# Altium PCB telemetry_RF_pcb_r4.PcbDoc (part 1 of 3)
Units mil, origin at the board's own origin, x right, y up, seen from the top; angles counter-clockwise.
Board outline 3620 x 3014 mil, 2 copper layers (Top Layer, Bottom Layer); 34 components, 32 nets, 214 pads, 35 vias.
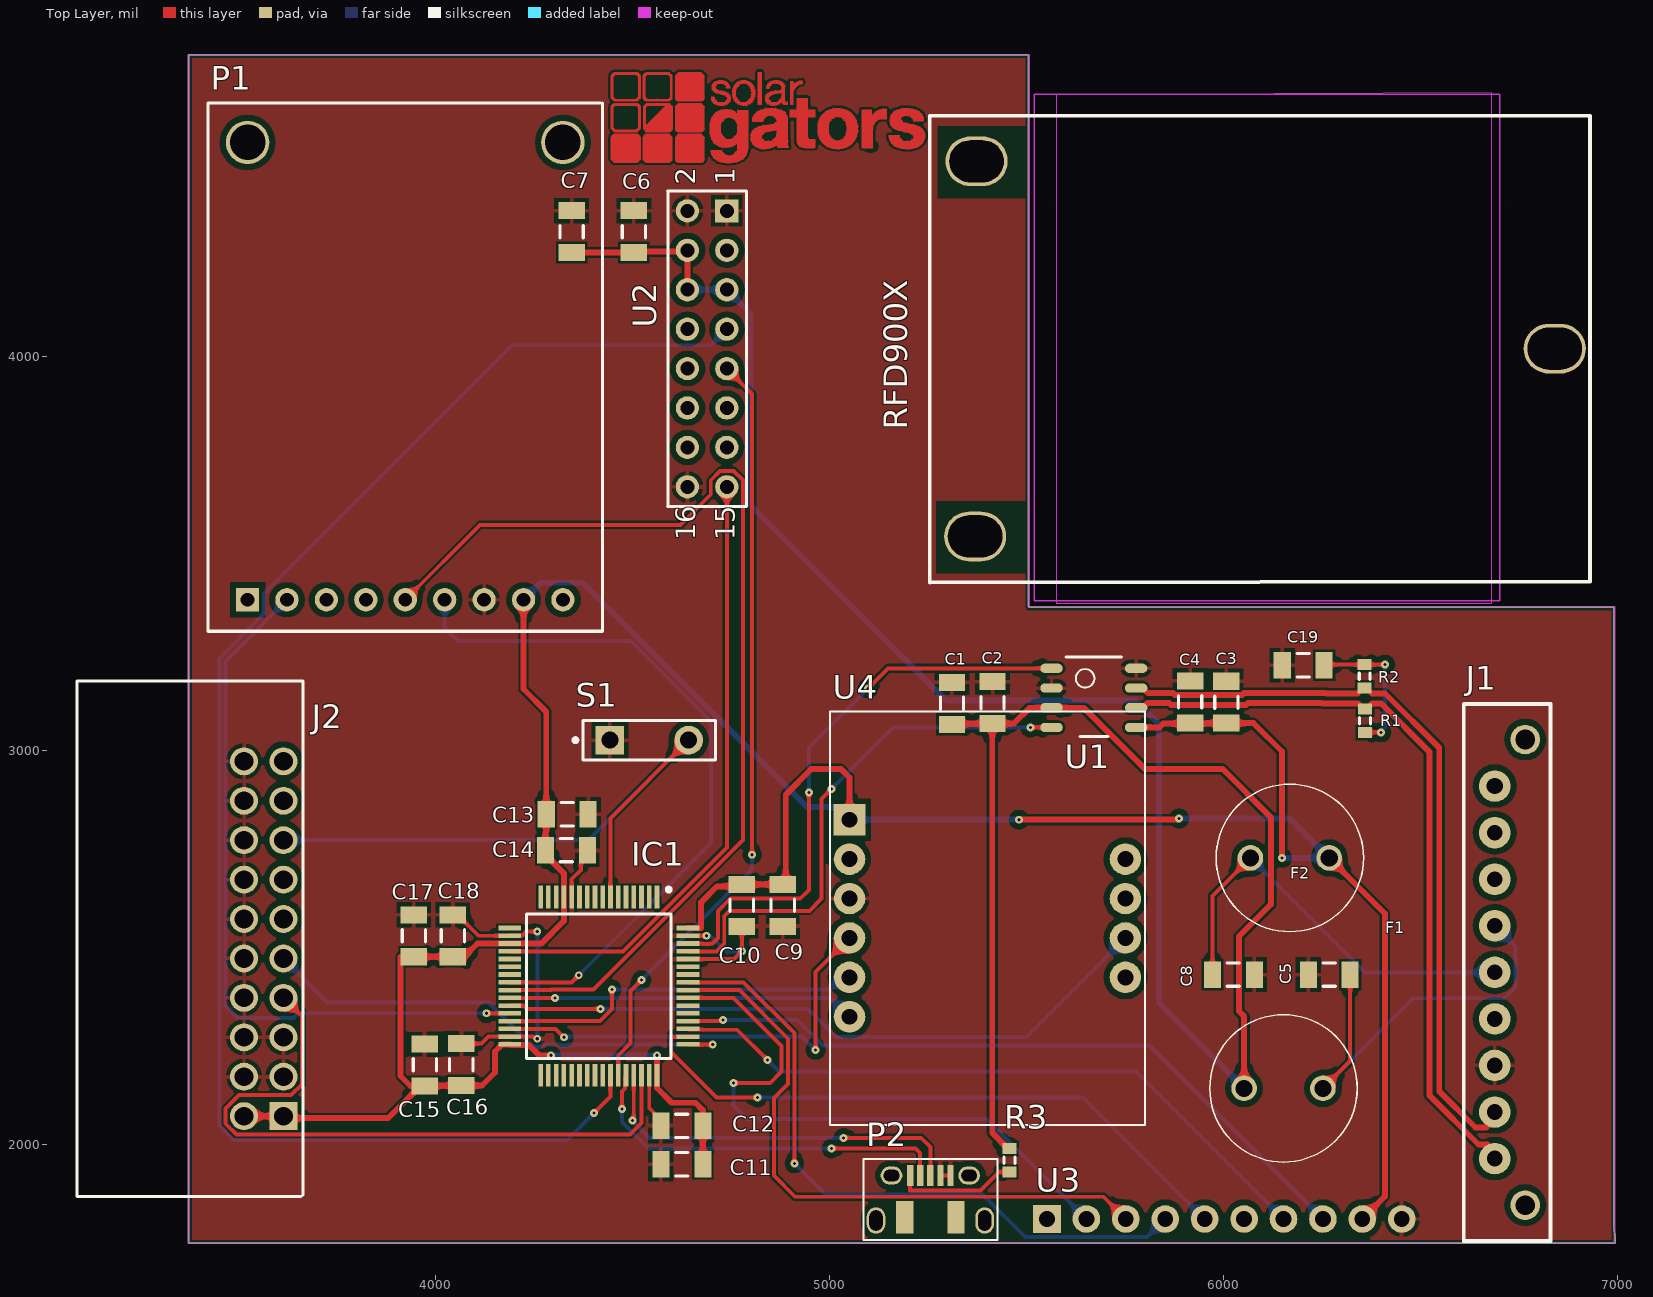
[diagram p0: Top Layer view]
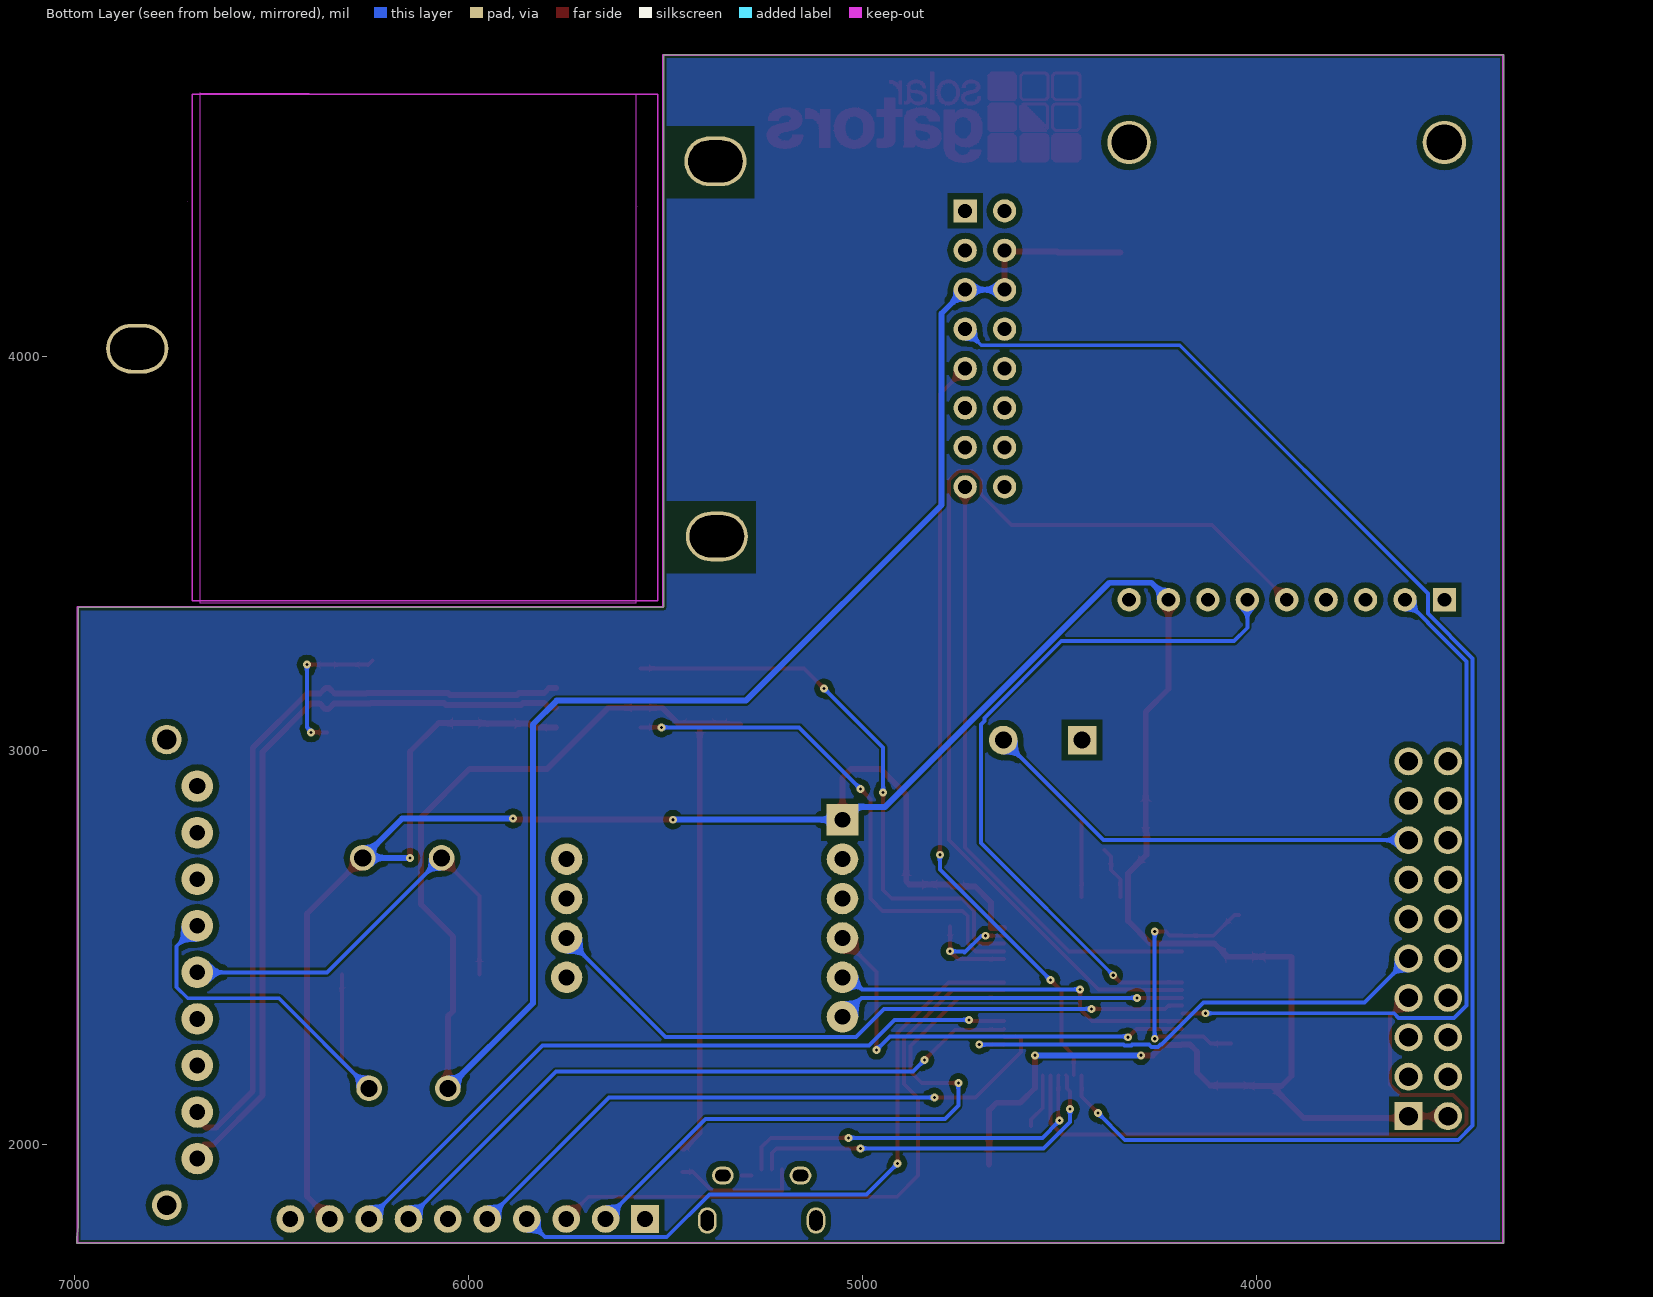
[diagram p1: Bottom Layer view, seen from below]

## Layer stack, top to bottom
Top Solder: solder mask 0.4, Solder Resist, Dk 3.5
Top Layer: signal copper 1.4
Dielectric 1: dielectric 12.6, FR-4, Dk 4.8
Bottom Layer: signal copper 1.4
Bottom Solder: solder mask 0.4, Solder Resist, Dk 3.5

## Board outline
5505,4765 5505,3365 5506,3364 6990,3364 6990,1792 6993,1764 6993,1751 3373,1751 3373,4764 3374,4765
cut-out: 6712,4392
cut-out: 5520,4665 5520,3380 6700,3380 6700,4665
cut-out: 5570,4380
cut-out: 5520,4665 6700,4665 6700,3380 5520,3380

## Design rules (kind name [scope] priority, off if disabled: settings)
Clearance [All] p1: gap=6 ignorepadtopadclearanceinfootprint=TRUE except(0: Arc-Hole Track-Hole SMDPad-Hole THPad-Hole Via-Hole Fill-Hole Poly-Hole Region-Hole Text-Hole; 9: THPad-THPad; 10: THPad-Via THPad-Text Via-Via Via-Text Fill-Text Poly-Text Region-Text Text-Text; 15: THPad-Fill THPad-Poly THPad-Region Via-Fill Via-Poly Via-Region Fill-Fill Fill-Poly Fill-Region Poly-Poly Poly-Region Region-Region)
ComponentClearance LCD [InComponent('U3')] p1: gap=0 collisioncheckmode=3 verticalgap=0 showdistances=FALSE
ComponentClearance GPS [InComponent('P1')] p2: gap=0 collisioncheckmode=3 verticalgap=0 showdistances=FALSE
DiffPairsRouting [All] p1: maxlimit=10 minlimit=10 mostfreqgap=10 toplayer_minwidth=15 toplayer_maxwidth=15 toplayer_prefwidth=15 bottomlayer_minwidth=15 bottomlayer_maxwidth=15 bottomlayer_prefwidth=15 maxuncoupledlength=500
HoleSize [All] p1: absolutevalues=TRUE maxlimit=247 minlimit=1 maxpercent=80.000 minpercent=20.000
MinimumSolderMaskSliver [All] p1 off: minsoldermaskwidth=10
PolygonConnect [InNet('GND') vs InNet('GND')] p1: connectstyle=Relief reliefconductorwidth=10 reliefentries=4 polygonreliefangle="90 Angle" airgapwidth=10
RoutingVias [All] p1: holewidth=16 width=50 viastyle="Through Hole" minholewidth=5 minwidth=20 maxholewidth=28 maxwidth=50
SilkToSilkClearance [All] p1 off: silktosilkclearance=10
SilkToSolderMaskClearance [IsPad] p1: minsilkscreentomaskgap=0.5 clearancetoexposedcopper=TRUE
SolderMaskExpansion [All] p1: expansion=4
Width [InNet('Vcc 3V3')] p1: maxlimit=15 minlimit=15 preferedwidth=15 minimp=50.000000 maximp=50.000000 favimp=50.000000
24 further rules are at their usual default settings.

## Classes and differential pairs
differential pair CAN: +CAN_P -CAN_N

## Components (designator, comment, footprint, x,y, rotation, side; value= is the part's Value field where it differs from the comment)
C1 "Cap Semi" C1206 5310.86,3120 r90 top value=100pF
C2 "Cap Semi" C1206 5413.86,3122 r90 top value=100pF
C3 "Cap Semi" C1206 6007,3123 r90 top value=100pF
C4 "Cap Semi" C1206 5915,3123.85 r90 top value=100pF
C5 "Cap Semi" C1206 6268,2432 r0 top value=100pF
C6 "Cap Semi" C1206 4504,4317 r90 top value=100pF
C7 "Cap Semi" C1206 4346,4317 r90 top value=100pF
C8 "Cap Semi" C1206 6025,2432 r180 top value=100pF
C9 "Cap Semi" C1206 4881.84,2607.76 r270 top value=100pF
C10 "Cap Semi" C1206 4777.84,2607.45 r270 top value=100pF
C11 "Cap Semi" C1206 4625.7,1950.76 r180 top value=100pF
C12 "Cap Semi" C1206 4625.7,2048.2 r180 top value=100pF
C13 "Cap Semi" C1206 4334.84,2838.76 r0 top value=100pF
C14 "Cap Semi" C1206 4332.84,2747.76 r0 top value=100pF
C15 "Cap Semi" C1206 3973.84,2202.76 r90 top value=100pF
C16 "Cap Semi" C1206 4065.84,2203.76 r90 top value=100pF
C17 "Cap Semi" C1206 3945.84,2530.56 r90 top value=100pF
C18 "Cap Semi" C1206 4044.84,2530.56 r90 top value=100pF
C19 "Cap Semi" C1206 6202,3217 r180 top value=100pF
F1 "56000001319" 56000001319 6377,2368.47 r180 top
F2 "56000001319" 56000001319 5943,2503 r0 top
IC1 "STM32F072RBT6TR" "STM32F072 64-pin" 4415.06,2402.6 r270 top
J1 "9-Pin Connector" 9-Pin 6829.73,1756.68 r90 top
J2 "61202021721" "ST-Link Header" 3615,2073 r90 top
P1 "GPS_Module" HDR1X10 3924,3303 r0 top
P2 "microUSB B" "microUSB B" 5256,1759 r0 top
R1 "Res3" J1-0603 6359,3076 r270 top value=60
R2 "Res3" J1-0603 6358,3189 r90 top value=60
R3 "Res3" J1-0603 5457,1961 r270 top value=1K
S1 "SW-PB" SPST-2 4543.02,3026.91 r0 top
U1 "TCAN1042HV" CANIC 5880.72,3104 r0 top
U2 "RFD900x" RFD900X_w_conn 5255.55,4609.45 r90 top
U3 "LCD" LCD 5202,1711.21 r0 top
U4 "IMU" IMU 5001,3100 r270 top

## Footprints (in the part's own frame and the unit in brackets; to place one, negate y for a bottom-side part, rotate by r counter-clockwise, add the part's x,y. Pads: shape width x height; smd on the part's side, far side on the other; paste and mask are expansions set on the pad)
9-Pin [mil]
  round 80 hole 41: 1(1153.54,141.73)
  round 80 hole 40: 2(1035.43,141.73) 3(917.32,141.73) 4(799.21,141.73) 5(681.1,141.73) 6(562.99,141.73) 7(444.88,141.73) 8(326.77,141.73) 9(208.66,141.73)
  round 75 hole 50: 10(90.55,64.57) 11(1271.65,64.57)
  silkscreen extent 0,0 1362,220
56000001319 [mm]
  round 1.65 hole 1.1: 1(3.175,5.715) 2(8.255,5.715)
  silkscreen extent 0.96,0.96 10.47,10.47
C1206 [mm] "Chip Capacitor, Body 3.2x1.6mm, IPC High Density"
  rect 1.1x1.7 smd: 1(-1.35,0) 2(1.35,0)
  silkscreen extent -0.4,-0.75 0.4,0.75, body extent -1.7,-0.9 1.7,0.9, height 1.3
CANIC [mm]
  oval 1.45x0.6 smd paste+0 mask+0.051: 1(-8.059,2.667) 2(-8.059,1.397) 3(-8.059,0.127) 4(-8.059,-1.143) 5(-2.609,-1.143) 6(-2.609,0.127) 7(-2.609,1.397) 8(-2.609,2.667)
  silkscreen extent -7.11,-1.74 -3.56,3.4, body extent -7.29,-1.68 -3.38,3.53, height 1.75
HDR1X10 [mm]
  rect 1.5x1.5 hole 0.9: 1(-10.16,2.032)
  round 1.5 hole 0.9: 2(-7.62,2.032) 3(-5.08,2.032) 4(-2.54,2.032) 5(0,2.032) 6(2.54,2.032) 7(5.08,2.032) 8(7.62,2.032) 9(10.16,2.032)
  round 2.794 hole 2.286 unplated: P$1(-10.16,31.496) P$2(10.16,31.496)
  silkscreen extent -12.7,0 12.7,34.04
IMU [mil]
  rect 80x80 hole 40: 1(275,50)
  round 80 hole 40: 2(375,50) 3(475,50) 4(575,50) 5(675,50) 6(775,50) 7(375,750) 8(475,750) 9(575,750) 10(675,750)
  silkscreen extent 0,0 1050,800
J1-0603 [mm] "Chip Resistor, Body 1.6x0.8mm, IPC High Density"
  rect 0.7x0.9 smd: 1(-0.75,0) 2(0.75,0)
  silkscreen extent -0.2,-0.35 0.2,0.35, body extent -0.85,-0.48 0.85,0.48, height 0.9
LCD [mil]
  rect 70x70 hole 40: 1(350,100.79)
  round 70 hole 40: 2(450,100.79) 3(550,100.79) 4(650,100.79) 5(750,100.79) 6(850,100.79) 7(950,100.79) 8(1050,100.79) 9(1150,100.79) 10(1250,100.79)
"microUSB B" [mm]
  rect 0.4x1.35 smd: 1(-1.3,4.15) 2(-0.65,4.15) 3(0,4.15) 4(0.65,4.15) 5(1.3,4.15)
  oval 1.4x1.15 hole 0.75 slot 1 at 0 deg unplated: P$1(-2.5,4.15) P$2(2.5,4.15)
  oval 1.2x1.7 hole 1.3 slot 0.85 at 0 deg unplated: P$3(-3.5,1.25) P$4(3.5,1.25)
  rect 1.1x2.1 smd: P$5(-1.65,1.45) P$6(1.65,1.45)
  silkscreen extent -4.32,0 4.32,5.21
RFD900X_w_conn [mm]
  rect 1.5x1.5 hole 0.9: 1(-6.097,13.1)
  round 1.5 hole 0.9: 2(-6.097,15.64) 3(-8.637,13.1) 4(-8.637,15.64) 5(-11.177,13.1) 6(-11.177,15.64) 7(-13.717,13.1) 8(-13.717,15.64) 9(-16.257,13.1) 10(-16.257,15.64) 11(-18.797,13.1) 12(-18.797,15.64) 13(-21.337,13.1) 14(-21.337,15.64) 15(-23.877,13.1) 16(-23.877,15.64)
  oval 3.2x4 hole 3.5 slot 2.7 at 0 deg: ""(-27.072,-2.9) ""(-14.972,-40.245) ""(-2.9,-2.99)
  Keep-Out Layer board cut-out: 1.397,-8.128 -31.368,-8.128 -31.369,-8.129 -31.369,-36.196 1.524,-36.196
  silkscreen extent -34.16,-42.52 1.4,16.91, body extent -29.99,-53.34 0.15,-8, height 7.5
SPST-2 [mm] "Switch; 2 Leads"
  rect 1.85x1.85 hole 1.1: 1(-2.54,0)
  round 1.85 hole 1.1: 2(2.54,0)
  silkscreen extent -4.89,-1.27 4.28,1.27
"ST-Link Header" [mm]
  rect 1.8x1.8 hole 1.2: 1(0,0)
  round 1.8 hole 1.2: 2(0,2.54) 3(2.54,0) 4(2.54,2.54) 5(5.08,0) 6(5.08,2.54) 7(7.62,0) 8(7.62,2.54) 9(10.16,0) 10(10.16,2.54) 11(12.7,0) 12(12.7,2.54) 13(15.24,0) 14(15.24,2.54) 15(17.78,0) 16(17.78,2.54) 17(20.32,0) 18(20.32,2.54) 19(22.86,0) 20(22.86,2.54)
  silkscreen extent -5.17,-1.25 28.03,13.3
"STM32F072 64-pin" [mm]
  rect 1.475x0.3 smd: 1(-5.738,3.75) 2(-5.738,3.25) 3(-5.738,2.75) 4(-5.738,2.25) 5(-5.738,1.75) 6(-5.738,1.25) 7(-5.738,0.75) 8(-5.738,0.25) 9(-5.738,-0.25) 10(-5.738,-0.75) 11(-5.738,-1.25) 12(-5.738,-1.75) 13(-5.738,-2.25) 14(-5.738,-2.75) 15(-5.738,-3.25) 16(-5.738,-3.75) 33(5.738,-3.75) 34(5.738,-3.25) 35(5.738,-2.75) 36(5.738,-2.25) 37(5.738,-1.75) 38(5.738,-1.25) 39(5.738,-0.75) 40(5.738,-0.25) 41(5.738,0.25) 42(5.738,0.75) 43(5.738,1.25) 44(5.738,1.75) 45(5.738,2.25) 46(5.738,2.75) 47(5.738,3.25) 48(5.738,3.75)
  rect 0.3x1.475 smd: 17(-3.75,-5.738) 18(-3.25,-5.738) 19(-2.75,-5.738) 20(-2.25,-5.738) 21(-1.75,-5.738) 22(-1.25,-5.738) 23(-0.75,-5.738) 24(-0.25,-5.738) 25(0.25,-5.738) 26(0.75,-5.738) 27(1.25,-5.738) 28(1.75,-5.738) 29(2.25,-5.738) 30(2.75,-5.738) 31(3.25,-5.738) 32(3.75,-5.738) 49(3.75,5.738) 50(3.25,5.738) 51(2.75,5.738) 52(2.25,5.738) 53(1.75,5.738) 54(1.25,5.738) 55(0.75,5.738) 56(0.25,5.738) 57(-0.25,5.738) 58(-0.75,5.738) 59(-1.25,5.738) 60(-1.75,5.738) 61(-2.25,5.738) 62(-2.75,5.738) 63(-3.25,5.738) 64(-3.75,5.738)
  silkscreen extent -6.35,-4.65 4.65,4.65, body extent -6,-6 6,6, height 1.6

## Part data
C1 C2 C3 C4 C5 C6 C7 C8 C9 C10 C11 C12 C13 C14 C15 C16 C17 C18 C19: "Capacitor (Semiconductor SIM Model)", LatestRevisionDate=29-May-2009, LatestRevisionNote="IPC-7351 Footprint Added.", PackageDescription="Chip Capacitor", PackageReference=C1206, Published=8-Jun-2000, Publisher="Altium Limited"
F1 F2: "Fuse", Manufacturer_Name=LITTELFUSE, Mouser Part Number=576-56000001319, Datasheet Link=https://componentsearchengine.com/Datasheets/1/56000001319.pdf, Height=4.3mm, Manufacturer_Part_Number=56000001319, Mouser Price/Stock=https://www.mouser.com/Search/Refine.aspx?Keyword=576-56000001319
IC1: "Integrated Circuit", Manufacturer_Name=STMicroelectronics, Mouser Part Number=511-STM32F072RBT6TR, Datasheet Link=https://componentsearchengine.com/Datasheets/1/STM32F072RBT6TR.pdf, Height=1.6mm, Manufacturer_Part_Number=STM32F072RBT6TR, Mouser Price/Stock=https://www.mouser.com/Search/Refine.aspx?Keyword=511-STM32F072RBT6TR
J2: "Wurth Elektronic 20 pin connector Programmar", Manufacturer_Name="Wurth Elektronik", Mouser Part Number=710-61202021721, Datasheet Link=https://componentsearchengine.com/Datasheets/1/61202021721.pdf, Height=9.25mm, Manufacturer_Part_Number=61202021721, Mouser Price/Stock=https://www.mouser.com/Search/Refine.aspx?Keyword=710-61202021721
P1: library part "Header 10", "Header, 10-Pin", LatestRevisionDate=17-Jul-2002, LatestRevisionNote="Re-released for DXP Platform.", Publisher="Altium Limited"
R1 R2 R3: "Resistor", LatestRevisionDate=29-May-2009, LatestRevisionNote="IPC-7351 Footprint Added.", PackageDescription="Chip Resistor", PackageReference=J1-0603, Published=8-Jun-2000, Publisher="Altium Limited"
S1: "Switch", LatestRevisionDate=17-Jul-2002, LatestRevisionNote="Re-released for DXP Platform.", PackageDescription="Switch; 2 Leads", PackageReference=SPST-2, Published=24-Mar-1999, Publisher="Altium Limited"
U1: "TCAN1042Fault ProtectedCAN Transceiverwith CAN FD", ComponentLink1Description=Datasheet, ComponentLink1URL=http://www.ti.com/lit/ds/symlink/tcan1042hgv.pdf
U2: "RF Modem", ComponentLink1Description="Datasheet Library", ComponentLink1URL=https://files.rfdesign.com.au/docs/, ComponentLink2Description=Connector, ComponentLink2URL=https://s3.amazonaws.com/catalogspreads-pdf/PAGE123%20.100%20SFH11%20SERIES%20FEMALE%20HDR%20ST%20RA.pdf

## Via types
v1: diameter 20, hole 7.87, Top Layer to Bottom Layer, 21 vias
v2: diameter 20, hole 8, Top Layer to Bottom Layer, 14 vias

## Nets (pads, with @x,y where several pads share a name; then routed paths per layer and width w, separated by ;. In a path a pad name is that pad's centre, name@x,y a point inside that pad or via, vN(x,y) a via of type N, cw(c..) or ccw(c..) an arc to the next point about the centre after c; other vN are vias at no path point)
5VT_F: C1.1 C2.1 C6.1 C7.1 F1.2 R3.1 U1.3 U2.4 U2.5 U2.6 | length 6115.9
  Top Layer w10: C7.1@4346,4263.85 C7.1@4348,4261.85 ; C2.1@5413,3068.85 C2.1@5413.86,3068.85
  Top Layer w15: C7.1@4346,4263.85 C6.1@4504,4263.85 4506.79,4266.64 4637.02,4266.64 U2.4@4639.8,4269.42 U2.6@4639.8,4169.42 ; C1.1@5310.86,3066.85 5363,3068.85 5413,3068.85 5413,2030.59 5453.06,1990.53 R3.1@5457,1990.53 ; C2.1@5413.86,3068.85 5468,3068.85 5508.15,3109 U1.3@5563.43,3109 5645,3109 5800,2954 5997,2954 6120,2831 6120,2610 6039,2529 6039,2339 6052,2326 F1.2@6052,2143.47
  Bottom Layer w15: U2.6@4639.8,4169.42 U2.5@4739.8,4169.42 4800,4109.23 4800,3623 5296,3127 5776,3127 5836,3067 5836,2359.47 F1.2@6052,2143.47
CAN_N: J1.9 R1.1 U1.6 | length 1931.3
  Top Layer w15: U1.6@5778,3109 5795.33,3109 5807.83,3121.5 5860.79,3121.5 5866.4,3115.9 6056.45,3115.9 6062.06,3121.5 6248.01,3121.5 6249.51,3120 6340.59,3120 6355.06,3105.53 6362.94,3105.53 6377.41,3120 6399.22,3120 6522,2997.22 6522,2125.7 6646.7,2001 6669.49,2001 6688,1982.49 J1.9@6688,1965.34
CAN_P: J1.8 R2.1 U1.7 | length 1925.2
  Top Layer w15: U1.7@5778,3159 5795.33,3159 5807.83,3146.5 5871.15,3146.5 5876.75,3140.9 6046.1,3140.9 6051.7,3146.5 6258.37,3146.5 6259.87,3145 6339.59,3145 6354.06,3159.47 6361.94,3159.47 6376.41,3145 6409.57,3145 6547,3007.57 6547,2136.06 6638.84,2044.22 6665.92,2044.22 6688,2066.3 J1.8@6688,2083.45
CS: IC1.50 U3.5 | length 1607.9
  Top Layer w10: IC1.50@4640.97,2274.65 4640.06,2273.74 4602.58,2273.74 4598.1,2269.27 4598.1,2236.03 4713.87,2120.27 v1(4818,2120.27)
  Bottom Layer w10: v1(4818,2120.27) 5643.73,2120.27 U3.5@5952,1812
F: IC1.52 U3.8 | length 1821.4
  Top Layer w10: IC1.52@4640.97,2314.02 4724.32,2314.02 4727.29,2317 v2(4730,2317)
  Bottom Layer w10: v2(4730,2317) 4919,2317 4984,2252 5812,2252 U3.8@6252,1812
GND: C1.2 C2.2 C3.2 C4.2 C5.1 C6.2 C7.2 C8.1 C9.2 C10.2 C11.2 C12.2 C13.2 C14.2 C15.2 C16.2 C17.2 C18.2 C19.2 IC1.12 IC1.18 IC1.31 IC1.47 IC1.60 IC1.63 J1.7 J2.3 J2.4 J2.5 J2.6 J2.8 J2.10 J2.12 J2.14 J2.16 J2.18 J2.20 P1.7 P2.4 P2.5 S1.1 U1.2 U1.8 U2.1 U2.2 U2.16 U3.10 U4.3 | length 1370.4
  Top Layer w10: C18.2@4044.84,2583.71 4056.65,2583.71 4109.8,2530.56 IC1.18@4189.16,2530.56 4190.06,2531.46 4221.02,2531.46 4230.55,2541 v2(4259,2541) ; C16.2@4065.84,2256.91 4117.53,2256.91 4135.26,2274.65 4248.35,2274.65 v2@4250,2273 ; IC1.12@4346.17,2628.51 4346.17,2673.88 4369.34,2697.05 4369.34,2731.11 C14.2@4385.99,2747.76 ; IC1.47@4543.02,2176.7 4543.02,2093.94 4572.55,2064.4 C12.2@4572.55,2048.2 ; IC1.60@4640.97,2471.5 4758.16,2471.5 v2(4777.84,2491.19) C10.2@4777.84,2554.3 ; IC1.63@4640.97,2530.56 v2(4687.93,2530.56) ; P2.4@5281.59,1922.39 P2.5@5307.18,1922.39
  Bottom Layer w10: v2(4259,2269.27) v2(4259,2541) ; v2(4687.93,2530.56) 4698.44,2530.56 4741,2488 4744.19,2491.19 v2(4777.84,2491.19)
GPIO1: IC1.20 U2.15 | length 1574.4
  Top Layer w10: IC1.20@4189.16,2491.19 4476.02,2491.19 4739.8,2754.97 U2.15@4739.8,3669.42
GPS_EN: IC1.28 P1.2 | length 1843.4
  Top Layer w10: v1(4130,2334) 4130.15,2333.85 4188.72,2333.85 IC1.28@4188.86,2334
  Bottom Layer w10: P1.2@3624,3372.03 P1.2@3624,3383 3566,3325 3566,3323.84 3468.47,3226.31 3468.47,2353.53 3500,2322 3640,2322 3652,2334 v1(4130,2334)
GPS_RX: IC1.24 P1.6 | length 1810.7
  Top Layer w10: IC1.24@4189.16,2412.45 4346.17,2412.45 v1(4364.19,2430.47)
  Bottom Layer w10: P1.6@4024,3383 4024,3312 4058,3278 4496,3278 4691,3083 4691,3075 4700,3066 4700,2766.28 v1(4364.19,2430.47)
GPS_TX: IC1.25 P1.5 | length 2684.9
  Top Layer w10: P1.5@3924,3383 4114,3573 4622,3573 4699,3650 4699,3686.08 4722.98,3710.05 4756.63,3710.05 4780.43,3686.25 4780.43,2772.97 4401.53,2394.08 4295.42,2394.08 4294.11,2392.76 IC1.25@4189.16,2392.76
J: IC1.26 U4.6 | length 885.3
  Top Layer w10: IC1.26@4190.06,2372.17 IC1.26@4189.16,2373.08 4302.31,2373.08 4303.22,2372.17 v1(4304.12,2373.08)
  Bottom Layer w10: v1@4303.05,2372 v1(4304.12,2373.08) 5002.92,2373.08 U4.6@5051,2325
K: IC1.27 U4.9 | length 1698.8
  Top Layer w10: IC1.27@4189.16,2353.39 4224.6,2353.39 4232.99,2345 v1(4419.11,2345)
  Bottom Layer w10: v1(4419.11,2345) 4945.9,2345 5017,2273.9 5499.9,2273.9 U4.9@5751,2525
LCD_RST: IC1.51 U3.7 | length 1710.8
  Top Layer w10: IC1.51@4640.97,2294.34 4643.13,2292.18 4765.82,2292.18 v1(4843,2215)
  Bottom Layer w10: v1(4843,2215) 4872.1,2185.9 5778.1,2185.9 U3.7@6152,1812
MISO: IC1.56 U3.3 | length 1606
  Top Layer w10: IC1.56@4640.97,2392.76 4771.57,2392.76 4895,2269.33 4895,2155 4859,2119 4859,1922 4912.48,1868.52 5695.48,1868.52 U3.3@5752,1812
MOSI: IC1.57 U3.4 | length 1691.8
  Top Layer w10: IC1.57@4640.97,2412.45 4782.57,2412.45 4911,2284.02 v1(4911,1953)
  Bottom Layer w10: v1(4911,1953) 4990,1874 5388.75,1874 5496.85,1765.9 5805.9,1765.9 U3.4@5852,1812
NetC5_2: C5.2 F1.1 J1.4 | length 1088.9
  Top Layer w10: F1.1@6252,2143.47 6321.15,2212.62 C5.2@6321.15,2432
  Bottom Layer w10: F1.1@6252,2143.47 6480.53,2372 6712,2372 6740,2400 6740,2503.89 J1.4@6688,2555.89
NetC8_2: C8.2 F2.1 J1.5 | length 1076
  Top Layer w10: C8.2@5971.85,2432 5971.85,2631.85 F2.1@6068,2728
  Bottom Layer w10: F2.1@6068,2728 6358.22,2437.78 J1.5@6688,2437.78
NetC19_1: C19.1 R1.2 R2.2 | length 387.9
  Top Layer w10: C19.1@6243.62,3228.53 6255.15,3217 6256.68,3218.53 v2(6409.57,3218.53) ; R1.2@6359,3046.47 6398.47,3046.47 v2@6399,3047
  Bottom Layer w10: v2(6399.22,3046.47) 6399.22,3049.18 6409.57,3059.53 v2(6409.57,3218.53)
NetP2_1: P2.1 R3.2 | length 325.1
  Top Layer w10: P2.1@5204.82,1938 5204.82,1884.52 5383.52,1884.52 5430.47,1931.47 R3.2@5457,1931.47
NRST: IC1.7 J2.15 S1.2 | length 1613.8
  Top Layer w10: IC1.7@4444.59,2628.51 4444.59,2828.49 S1.2@4643.02,3026.91
  Bottom Layer w10: J2.15@3615,2773 4389.1,2773 S1.2@4643.02,3026.91
RX: IC1.42 U2.7 | length 3954.8
  Top Layer w10: v1(4402.4,2080.5) 4444.59,2122.69 IC1.42@4444.59,2176.7
  Bottom Layer w10: v1(4402.4,2080.5) 4334.9,2013 3489,2013 3452.47,2049.53 3452.47,3234.09 3566,3347.63 3566,3399.16 4195.46,4028.62 4699,4028.62 U2.7@4739.8,4069.42
RXD: IC1.61 U1.4 | length 1346.5
  Top Layer w10: IC1.61@4640.97,2491.19 4713.07,2491.19 4733.28,2511.39 4733.28,2580.55 4746.47,2593.75 4949,2593.75 4980,2624.75 4980,2878 v2(5005,2903) ; v1(5510,3059) U1.4@5563.43,3059
  Bottom Layer w10: v2(5005,2903) 5161,3059 v1(5510,3059)
SCK: IC1.55 U3.2 | length 1558.9
  Top Layer w10: IC1.55@4640.97,2373.08 4756.92,2373.08 4879,2251 4879,2186 4850,2157 v1(4757,2157)
  Bottom Layer w10: v1(4757,2157) 4757,2100 4791,2066 5398,2066 U3.2@5652,1812
SCL: IC1.29 U4.5 | length 937
  Top Layer w10: IC1.29@4189.16,2314.02 4417.83,2314.02 4448.36,2344.55 v1(4448.36,2394.41)
  Bottom Layer w10: v1(4448.36,2394.41) 5001.47,2394.41 5032.06,2425 U4.5@5051,2425
SDA: IC1.30 U4.4 | length 1119.4
  Top Layer w10: IC1.30@4189.16,2294.34 4305.66,2294.34 v1(4327,2273) ; v1(4965,2241) 4965,2439 U4.4@5051,2525
  Bottom Layer w10: v1(4327,2273) 4329.26,2275.26 4930.74,2275.26 v1(4965,2241)
SWCLK: IC1.49 J2.9 | length 1251.1
  Top Layer w10: IC1.49@4640.97,2254.97 4643.02,2252.92 4644.35,2254.26 v1(4704.11,2254.26)
  Bottom Layer w10: J2.9@3615,2473 3727,2361 4135.21,2361 4241.96,2254.26 4244.31,2254.26 4250.3,2248.27 4267.7,2248.27 4273.69,2254.26 4316.04,2254.26 4318.3,2252 4335.7,2252 4337.96,2254.26 v1(4704.11,2254.26)
SWDIO: IC1.46 J2.7 | length 1694.9
  Top Layer w10: J2.7@3615,2373 3661.53,2326.47 3661.53,2153.73 3634.27,2126.47 3502.66,2126.47 3468.47,2092.27 3468.47,2053.73 3495.73,2026.47 4494.17,2026.47 4523.33,2055.63 IC1.46@4523.33,2176.7
TX: IC1.43 U2.9 | length 1962
  Top Layer w10: IC1.43@4464.28,2176.7 4464.28,2227.28 4495.23,2258.23 4495.23,2390.33 4522.86,2417.96 v1(4523.42,2417.96) v1@4525.1,2417.96 ; U2.9@4739.8,3969.42 4804,3905.23 v1(4804,2736)
  Bottom Layer w10: v1(4523.42,2417.96) 4804,2698.54 v1(4804,2736)
TXD: IC1.62 U1.1 | length 1464.5
  Top Layer w10: IC1.62@4640.97,2510.87 4677.91,2510.87 4679.23,2509.56 4696.63,2509.56 4697.94,2510.87 4703.15,2510.87 4717.28,2525 4717.28,2593.75 4748.53,2625 4926,2625 4948,2647 v2(4948,2894) ; v2(5098,3158) 5149,3209 U1.1@5563.43,3209
  Bottom Layer w10: v2(4948,2894) 4948,3008 v2(5098,3158)
USB_N: IC1.44 P2.2 | length 952.9
  Top Layer w10: v1(4473.84,2091) 4473.84,2135.62 4481.28,2143.06 4481.28,2174.02 IC1.44@4483.96,2176.7 ; v1(5005,1991) 5218.35,1991 5229.77,1979.57 5229.77,1938.64 P2.2@5230.41,1938
  Bottom Layer w10: v1(4473.84,2091) 4473.84,2058.46 4541.3,1991 v1(5005,1991)
USB_P: IC1.45 P2.3 | length 958.1
  Top Layer w10: v1(4500,2062) 4500,2064.71 4503.65,2068.35 4503.65,2175.38 4502.99,2176.04 IC1.45@4503.65,2176.7 ; v1(5036,2018) 5233,2018 5256,1995 P2.3@5256,1938
  Bottom Layer w10: v1(4500,2062) 4501,2062 4503,2060 4503,2059 4544,2018 v1(5036,2018)
"Vcc 3V3": C3.1 C4.1 C9.1 C10.1 C11.1 C12.1 C13.1 C14.1 C15.1 C16.1 C17.1 C18.1 F2.2 IC1.13 IC1.19 IC1.32 IC1.48 IC1.64 J2.1 J2.2 P1.8 U1.5 U3.9 U4.1 | length 8213.3
  Top Layer w15: J2.2@3515,2073 J2.1@3615,2073 ; J2.1@3610,2068 3880.42,2068 C15.1@3962.03,2149.61 ; P1.8@4224,3383 4224,3156.69 4281.69,3099 4281.69,2794 4279.69,2792 4279.69,2735.95 4326.48,2689.16 4326.48,2568 4268.94,2510.46 4236.3,2510.46 4236.06,2510.69 4189.34,2510.69 IC1.19@4189.16,2510.87 4107.47,2510.87 4074,2477.41 3912,2477.41 3912,2175 3937.39,2149.61 C15.1@3962.03,2149.61 ; v2(4294.11,2227.28) 4263.72,2227.28 4237.63,2253.37 4190.75,2253.37 IC1.32@4189.16,2254.97 4169.97,2254.97 4151.84,2236.84 4151.84,2183.61 4118.84,2150.61 4020,2150.61 4019,2149.61 C15.1@3962.03,2149.61 ; v2(4562.7,2227.28) 4562.7,2144.3 4600,2107 4660.12,2107 4678.85,2088.27 C12.1@4678.85,2048.2 C11.1@4678.85,1950.76 ; IC1.64@4640.97,2550.24 4674.38,2550.24 4674.67,2550.53 4674.67,2615.67 4714.78,2655.78 4773.02,2655.78 C10.1@4777.84,2660.6 4778,2660.75 4881.68,2660.75 C9.1@4881.84,2660.91 4889.33,2668.4 4889.33,2888.67 4954.66,2954 5029,2954 5051,2932 U4.1@5051,2825 ; v2(5481,2825) 5882.65,2825 5885.65,2828 v2(5887,2828) ; U1.5@5778,3059 5837,3059 5846.85,3068.85 5956,3068.85 5957,3069.85 6076,3069.85 6148,2997.85 v1(6148,2728) ; F2.2@6268,2728 6409,2587 6409,1869 U3.9@6352,1812
  Bottom Layer w15: P1.8@4224,3383 4267.13,3426.13 4374.04,3426.13 4942.66,2857.5 5018.5,2857.5 U4.1@5051,2825 v2(5481,2825) ; v2(4294.11,2227.28) v2(4562.7,2227.28) ; v2(5887,2828) 6168,2828 F2.2@6268,2728 v1(6148,2728)
pads on no net: IC1.1 IC1.2 IC1.3 IC1.4 IC1.5 IC1.6 IC1.8 IC1.9 IC1.10 IC1.11 IC1.14 IC1.15 IC1.16 IC1.17 IC1.21 IC1.22 IC1.23 IC1.33 IC1.34 IC1.35 IC1.36 IC1.37 IC1.38 IC1.39 IC1.40 IC1.41 IC1.53 IC1.54 IC1.58 IC1.59 J1.1 J1.2 J1.3 J1.6 J1.10 J1.11 J2.11 J2.13 J2.17 J2.19 P1.1 P1.3 P1.4 P1.9 P1.P$1 P1.P$2 P2.P$1 P2.P$2 P2.P$3 P2.P$4 P2.P$5 P2.P$6 U2. U2.3 U2.8 U2.10 U2.11 U2.12 U2.13 U2.14 U3.1 U3.6 U4.2 U4.7 U4.8 U4.10
copper on no net: | length 76343